# Altium PCB Ruler_PCB.PcbDoc
Units mil, origin at the board's own origin, x right, y up, seen from the top; angles counter-clockwise.
Board outline 1897 x 1407 mil, 2 copper layers (Top Layer, Bottom Layer); 18 components, 24 nets, 71 pads, 0 vias.
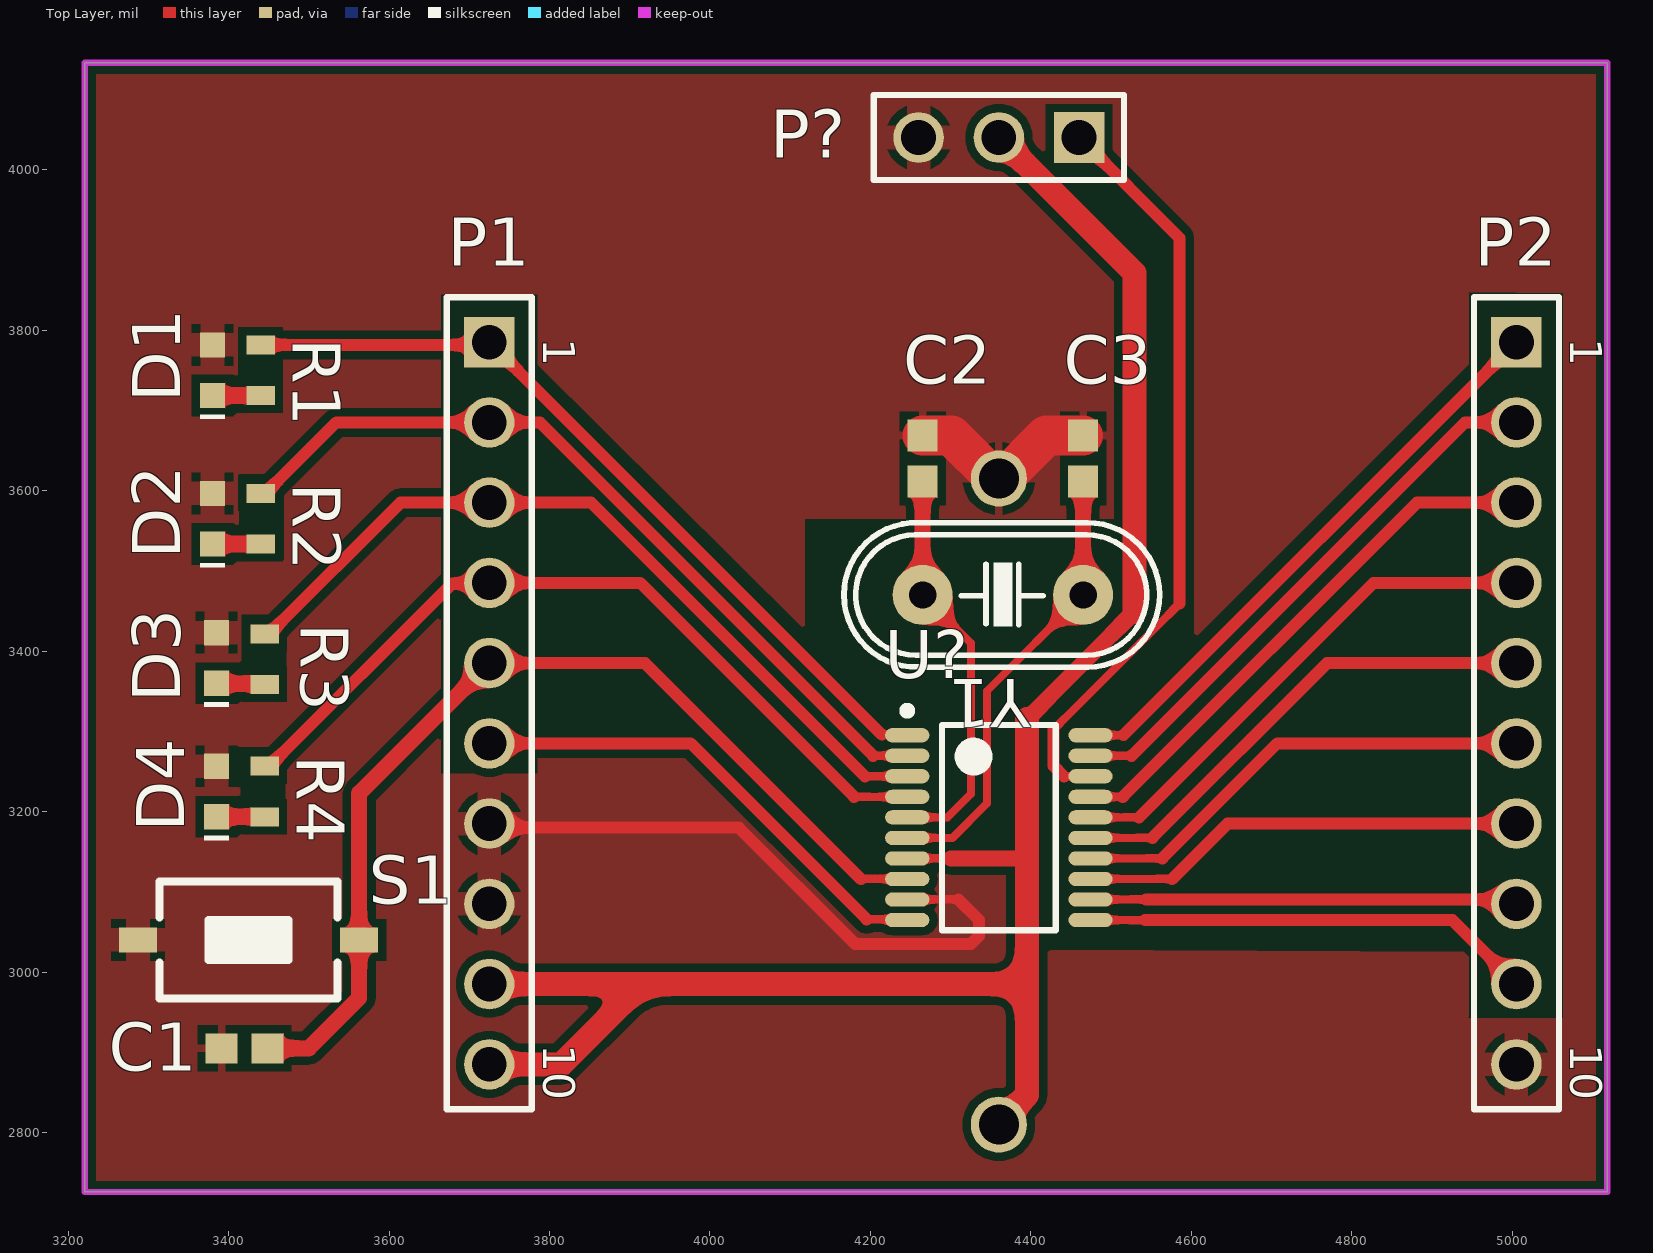
[diagram p0: Top Layer view]
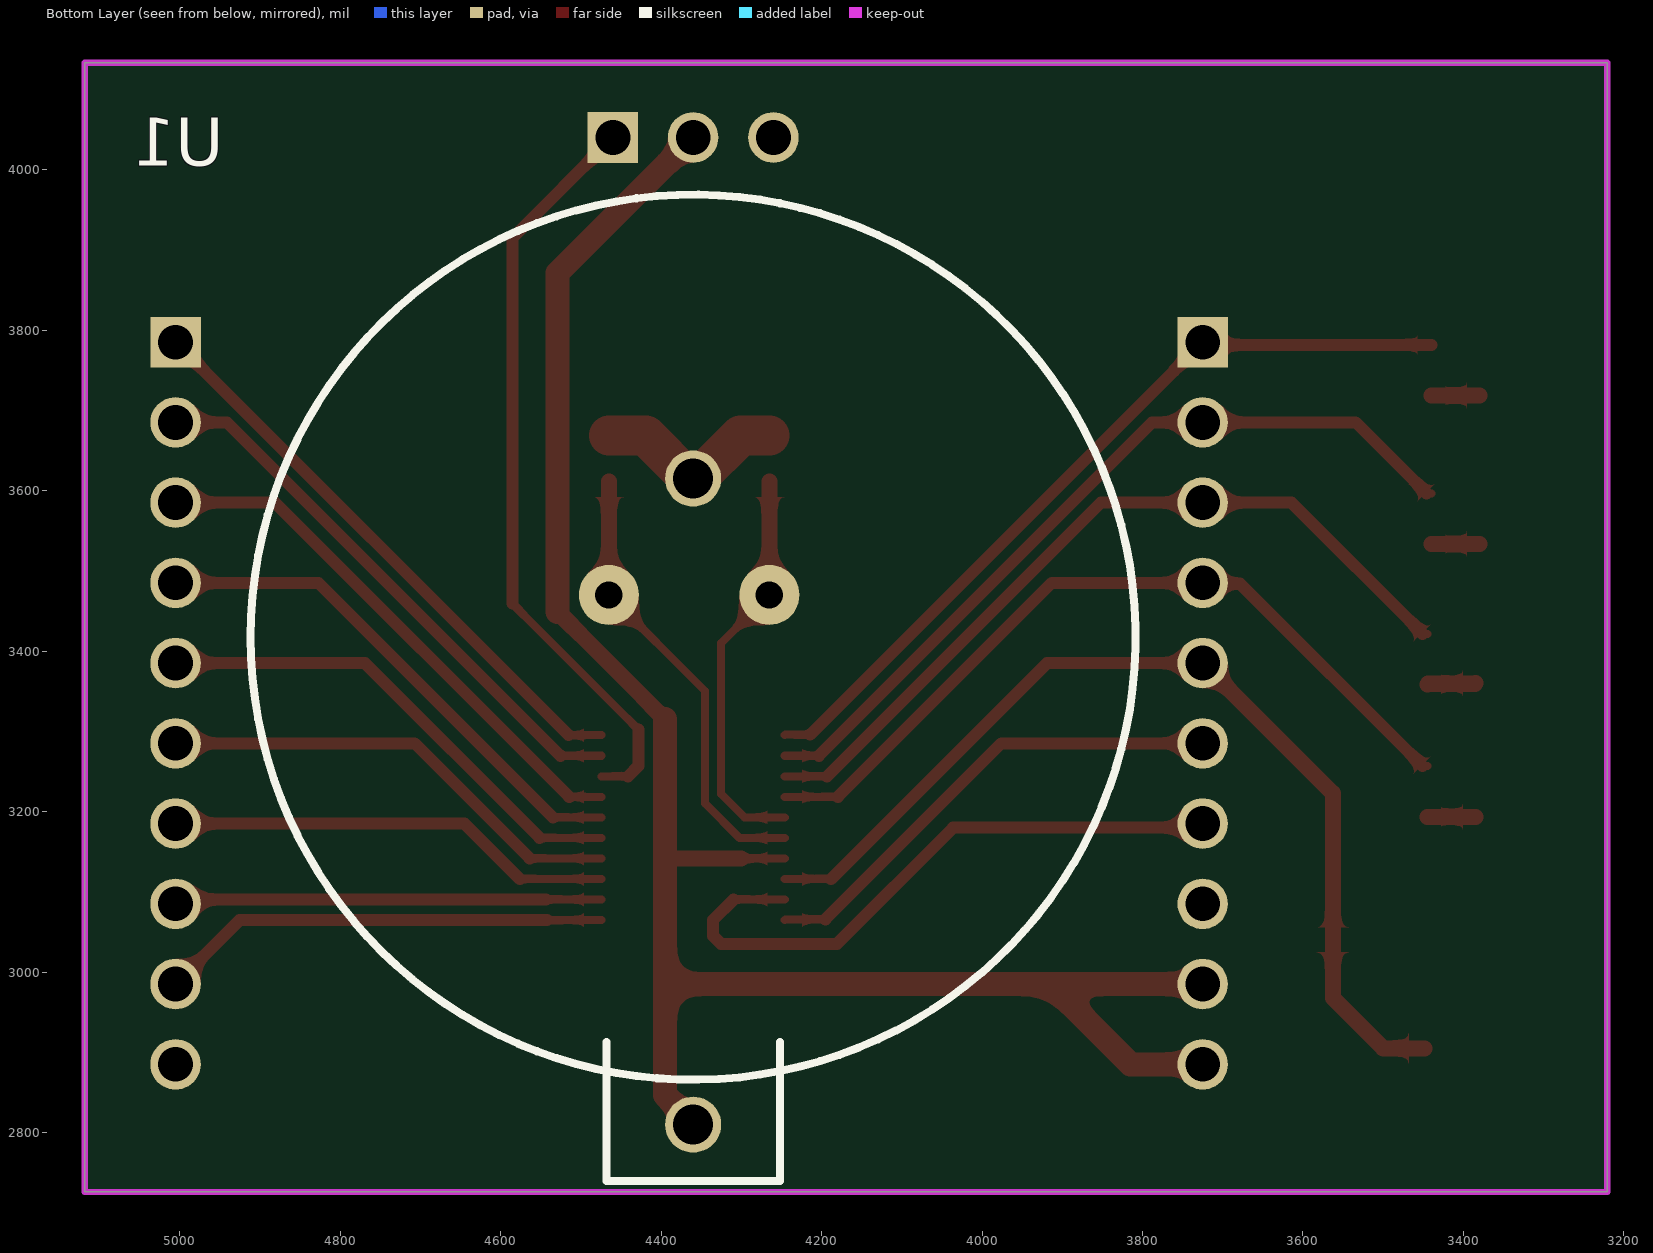
[diagram p1: Bottom Layer view, seen from below]
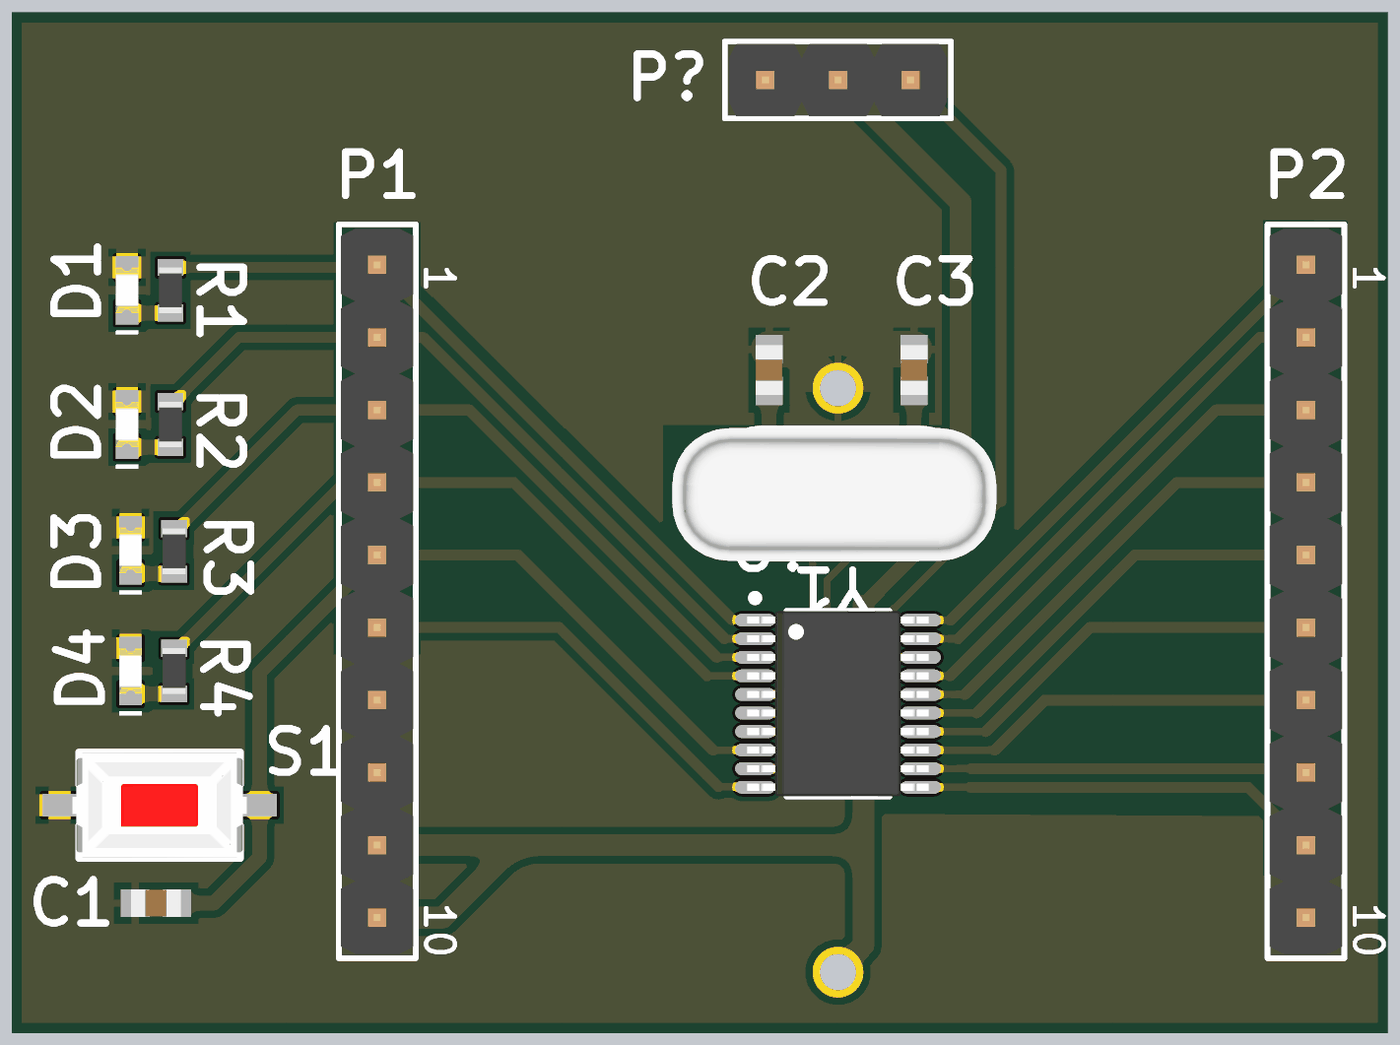
[diagram p2: 3D render of the assembled board from above, using the file's embedded part models]

## Layer stack, top to bottom
Top Solder: solder mask 0.4, Solder Resist, Dk 3.5
Top Layer: signal copper 1.4
Dielectric 1: dielectric 12.6, FR-4, Dk 4.8
Bottom Layer: signal copper 1.4
Bottom Solder: solder mask 0.4, Solder Resist, Dk 3.5

## Board outline
3221,2726 3221,4133 5118,4133 5118,2726

## Design rules (kind name [scope] priority, off if disabled: settings)
Clearance [All] p1: gap=10 ignorepadtopadclearanceinfootprint=TRUE
PolygonConnect PolygonConnect_3 [All vs IsNamedPolygon('NONET_L01_P000')] p1: thpad.connectstyle=Relief thpad.reliefconductorwidth=30 thpad.reliefentries=4 thpad.polygonreliefangle="90 Angle" thpad.airgapwidth=10 smdpad.connectstyle=Relief smdpad.reliefconductorwidth=30 smdpad.reliefentries=4 smdpad.polygonreliefangle="90 Angle" smdpad.airgapwidth=10 via.connectstyle=Relief via.reliefconductorwidth=10 via.reliefentries=4 via.polygonreliefangle="90 Angle" via.airgapwidth=10
PolygonConnect PolygonConnect_2 [All vs IsNamedPolygon('NONET_L01_P000')] p2: thpad.connectstyle=Relief thpad.reliefconductorwidth=30 thpad.reliefentries=4 thpad.polygonreliefangle="90 Angle" thpad.airgapwidth=10 smdpad.connectstyle=Relief smdpad.reliefconductorwidth=30 smdpad.reliefentries=4 smdpad.polygonreliefangle="90 Angle" smdpad.airgapwidth=10 via.connectstyle=Relief via.reliefconductorwidth=10 via.reliefentries=4 via.polygonreliefangle="90 Angle" via.airgapwidth=10
PolygonConnect PolygonConnect_1 [All vs IsNamedPolygon('NONET_L01_P000')] p3: thpad.connectstyle=Relief thpad.reliefconductorwidth=10 thpad.reliefentries=4 thpad.polygonreliefangle="90 Angle" thpad.airgapwidth=30 smdpad.connectstyle=Relief smdpad.reliefconductorwidth=10 smdpad.reliefentries=4 smdpad.polygonreliefangle="90 Angle" smdpad.airgapwidth=10 via.connectstyle=Relief via.reliefconductorwidth=10 via.reliefentries=4 via.polygonreliefangle="90 Angle" via.airgapwidth=10
PolygonConnect [All] p4: connectstyle=Relief reliefconductorwidth=10 reliefentries=4 polygonreliefangle="90 Angle" airgapwidth=10
RoutingVias [All] p1: holewidth=28 width=50 viastyle="Through Hole" minholewidth=28 minwidth=50 maxholewidth=28 maxwidth=50
SolderMaskExpansion [All] p1: expansion=4 istentingtop=FALSE
Width [All] p1: maxlimit=50 minlimit=10 preferedwidth=20 minimp=50.000000 maximp=50.000000 favimp=50.000000
30 further rules are at their usual default settings.

## Classes and differential pairs
component class 01_MCU: C1 C2 C3 D1 D2 D3 D4 P2 R1 R2 R3 R4 S1 U1 U? Y1

## Components (designator, comment, footprint, x,y, rotation, side; value= is the part's Value field where it differs from the comment)
C1 "22pF" CAPC17595_87N_KEM_0603 3420,2905 r180 top
C2 "20pF" CAPC17595_87N_KEM_0603 4265,3640 r270 top
C3 "20pF" CAPC17595_87N_KEM_0603 4465,3640 r270 top
D1 "Color ? , 3.2V, 140°" WL-SMCW_0603_150060xx75003 3380,3750 r90 top
D2 "Color ? , 3.2V, 140°" WL-SMCW_0603_150060xx75003 3380,3565 r90 top
D3 "Color ? , 3.2V, 140°" WL-SMCW_0603_150060xx75003 3385,3391.5 r90 top
D4 "Color ? , 3.2V, 140°" WL-SMCW_0603_150060xx75003 3385,3225 r90 top
P1 "61301011121" 61301011121 3725,3335 r270 top (schematic designator P?)
P2 "61301011121" 61301011121 5005,3335 r270 top (schematic designator P?)
P? "61300311121" 61300311121 4360,4040 r180 top
R1 "100Ω" "WRIS-PSMB_0603_L1.6W0.8H0.3 - duplicate" 3440,3750 r270 top
R2 "100Ω" "WRIS-PSMB_0603_L1.6W0.8H0.3 - duplicate" 3440,3565 r270 top
R3 "100Ω" "WRIS-PSMB_0603_L1.6W0.8H0.3 - duplicate" 3445,3390 r270 top
R4 "100Ω" "WRIS-PSMB_0603_L1.6W0.8H0.3 - duplicate" 3445,3225 r270 top
S1 "Tact SW - 2Pin" SW-SMD 3425,3040 r180 top
U1 "CR2032_Battery Base" TO_106_KEY 4360,3615 r180 bottom
U? "CH32V003F4P6" TSOP20_CH32V003 4360,3180 r0 top
Y1 "24MHz" XT2 4365,3470 r0 top

## Footprints (in the part's own frame and the unit in brackets; to place one, negate y for a bottom-side part, rotate by r counter-clockwise, add the part's x,y. Pads: shape width x height; smd on the part's side, far side on the other; paste and mask are expansions set on the pad)
61300311121 [mm] "Pin Header, pitch 2.54 mm, THT, Vertical, single row, 3p"
  rect 1.6x1.6 hole 1.1: 1(-2.54,0)
  round 1.6 hole 1.1: 2(0,0) 3(2.54,0)
  silkscreen extent -3.96,-1.35 3.96,1.35, body extent -3.81,-1.27 3.81,1.27, height 8.57
61301011121 [mm] "Pin Header, pitch 2.54 mm, THT, Vertical, single row, 10p"
  rect 1.6x1.6 hole 1.1: 1(-11.43,0)
  round 1.6 hole 1.1: 2(-8.89,0) 3(-6.35,0) 4(-3.81,0) 5(-1.27,0) 6(1.27,0) 7(3.81,0) 8(6.35,0) 9(8.89,0) 10(11.43,0)
  silkscreen extent -12.85,-1.35 12.85,1.35, body extent -12.7,-1.27 12.7,1.27, height 8.57
CAPC17595_87N_KEM_0603 [mm]
  rect 1.006x0.95 smd paste+0 mask+0: 1(-0.728,0) 2(0.728,0)
  body extent -0.87,-0.48 0.87,0.48, height 0.87
SW-SMD [mm] "Switch SMD type"
  rect 1.2x0.8 smd: 1(-3.5,0) 2(3.5,0)
  silkscreen extent -2.82,-1.85 2.82,1.85, body extent -3.05,-1.85 3.05,1.85, height 2.5
TO_106_KEY [mil]
  round 70 / inner round 60 / far side round 70 hole 50 paste-35 mask+0: 1(0,0) 2(0,-805.12)
  silkscreen extent -552,-875 551,354
TSOP20_CH32V003 [mm] "TSOP, 20-Leads, Body 6.45x4.35mm, Pitch 0.65mm, IPC Medium Density"
  oval 1.4x0.45 smd: 1(-2.9,2.925) 2(-2.9,2.275) 3(-2.9,1.625) 4(-2.9,0.975) 5(-2.9,0.325) 6(-2.9,-0.325) 7(-2.9,-0.975) 8(-2.9,-1.625) 9(-2.9,-2.275) 10(-2.9,-2.925) 11(2.9,-2.925) 12(2.9,-2.275) 13(2.9,-1.625) 14(2.9,-0.975) 15(2.9,-0.325) 16(2.9,0.325) 17(2.9,0.975) 18(2.9,1.625) 19(2.9,2.275) 20(2.9,2.925)
  silkscreen extent -3.02,-3.25 1.8,3.82, body extent -3.17,-3.25 3.17,3.25, height 1.1
WL-SMCW_0603_150060xx75003 [mm] "SMD Mono-color Chip LED, body 1.6x0.8mm"
  rect 0.8x0.8 smd: 1(-0.8,0) 2(0.8,0)
  silkscreen extent -1.55,-0.4 -1.4,0.4, body extent -0.8,-0.4 0.8,0.4, height 0.7
"WRIS-PSMB_0603_L1.6W0.8H0.3 - duplicate" [mm] "Metal Plate Resistor, SMT, body size 1.6x0.8mm"
  rect 0.6x0.9 smd: 1(-0.8,0) 2(0.8,0)
  body extent -0.8,-0.4 0.8,0.4, height 0.3
XT2 [mil] "Footpin for Crystal 2 pin"
  round 75 hole 34: 1(-100,0) 2(100,0)
  silkscreen extent -198,-90 195,90, body extent -233,-93 213,90, height 138

## Part data
C1 C2 C3: library part Capacitor_SMD, "No Description Available", Manufacturer_Part_Number=C1206C104K5RACTU, Mfr_Name=Kemet, Copyright="Copyright (C) 2023 Ultra Librarian. All rights reserved.", RefDes=RefDes, Type=DEV
D1 D2 D3 D4: library part LED_smd, "WL-SMCW Mono-color Chip LED Waterclear, size ?, color ?, 3.2V, 140°", Case/Size Code=0603, Emitting Color=Blue, Forward Voltage=3.2V, Manufacturer="Wurth Elektronik", Manufacturer Part Number=150060BS75003, Operating Temperature Max=100°C, Operating Temperature Min=-40°C, Category="Signal LEDs", Chip Technology=InGaN, ComponentLink1Description="Website Link", ComponentLink1URL=https://www.we-online.com/redexpert/article/150060BS75003?ad, ComponentLink2Description="Datasheet Link", ComponentLink2URL=https://www.we-online.com/redexpert/spec/150060BS75003?ad, Dominant Wavelength=470nm, Height=0.7mm, Length=1.6mm, Luminous Intensity=350mcd, Match Code=WL-SMCW, Mount="Surface Mount", Packaging="Tape and Reel", Peak Wavelength=465nm, Viewing Angle=140°, Width=0.8mm
P1 P2: "WR-PHD Pin Header, THT, pitch 2.54mm, Single Row, Vertical, 10p", Contact Resistance=20mOhm, Manufacturer="Wurth Elektronik", Operating Temperature="-40 to +105degC", Rated Current=3A, Withstanding Voltage=500VAC, Working Voltage=250VAC, ComponentLink1Description=Manufacturer, ComponentLink1URL=http://www.we-online.de, ComponentLink2Description=Datasheet, ComponentLink2URL=https://www.we-online.com/catalog/datasheet/61301011121.pdf, Gender="Pin Header", Manufacturer Part Number=61301011121, Mounting Technology=THT, Orientation=Vertical, Packaging=Bag, Pin Number=10, Pitch=2.54mm, Published Date="May 2020", Row Number=Single
P?: "WR-PHD Pin Header, THT, pitch 2.54mm, Single Row, Vertical, 3p", Contact Resistance=20mOhm, Manufacturer="Wurth Elektronik", Operating Temperature="-40 to +105degC", Rated Current=3A, Withstanding Voltage=500VAC, Working Voltage=250VAC, ComponentLink1Description=Manufacturer, ComponentLink1URL=http://www.we-online.de, ComponentLink2Description=Datasheet, ComponentLink2URL=https://www.we-online.com/catalog/datasheet/61300311121.pdf, Gender="Pin Header", Manufacturer Part Number=61300311121, Mounting Technology=THT, Orientation=Vertical, Packaging=Bag, Pin Number=3, Pitch=2.54mm, Published Date="May 2020", Row Number=Single
R1 R2 R3 R4: library part Resistor_SMD, "WRIS-PSMC Metal Plate Resistor, SMT, size 2512, 2W, 5mΩ, +/-1%", Case/Size Code=2512, Manufacturer="Wurth Elektronik", Manufacturer Part Number=580070763005, Operating Temperature Max=155°C, Operating Temperature Min=-55°C, Rated Current=20A, Rated Power=2W, Resistance=5mΩ, Resistance Tolerance=+/-1%, Temperature Coefficient of Resistance=+/-100ppm/°C, Category="Metal Plate Resistors", ComponentLink1Description="Website Link", ComponentLink1URL=https://www.we-online.com/redexpert/article/580070763005?ad, ComponentLink2Description="Datasheet Link", ComponentLink2URL=https://www.we-online.com/redexpert/spec/580070763005?ad, Height=0.51mm, Length=6.3mm, Match Code=WRIS-PSMC, Mount="Surface Mount", Packaging="Tape and Reel", Technical Reference=MC2512R005F201KAATE0000, Width=3.1mm
S1: "Switch button 2 pin"
U1: "No Description Available", Mfr_Name="Keystone Electronics", RefDes=RefDes, Type=Type
U?: "CH32V003 series is based on QingKe RISC-V2A core design of industrial-grade general-purpose microcontroller, support 48MHz system main frequency, with wide voltage, 1-wire serial debug interface, low-power consumption, ultra-small package, etc. CH32V003 series built-in a group of DMA controller, a group of 10-bit ADC, a group of op-amp comparators, multiple timers and standard communication interfaces USART, I2C, SPI, etc.", Built-in voltage regulator="1.5V power supply required by the core", Manufaccture=WCH, Operating voltage="2.7V to 5.5V", ComponentLink1Description=Datasheet, ComponentLink1URL=http://www.wch-ic.com/downloads/CH32V003DS0_PDF.html, ComponentLink2Description="Reference Manual", ComponentLink2URL=http://www.wch-ic.com/downloads/CH32V003RM_PDF.html, ComponentLink3Description="Evaluation board manual and reference routines", ComponentLink3URL=http://www.wch.cn/downloads/CH32V003EVT_ZIP.html, ComponentLink4Description=IDE, ComponentLink4URL=http://www.wch-ic.com/products/www.mounriver.com/, FLASH="16KB program Flash memory (CodeFlash) for storing user applications", HSE=4~25MHz, HSI="8MHz, 16MHz, 24MHz, 48MHz", LSI=128kHz, SRAM="2KB, starting address 0x20000000, supports byte, half-word,(2 bytes), and full-word (4bytes) access", System memory="1920B (bootloader) for storing the system bootloader (factory-cured bootloader)", User-selected word storage=64B, Vendor configuration word storage, factory-cured and unmodifiable by users=64B
Y1: library part XTAL, "Crystal Oscillator", LatestRevisionDate=17-Jul-2002, LatestRevisionNote="Re-released for DXP Platform.", PackageDescription="Crystal, Thru-Hole; 2 Leads; Body 3.1 x 8.2 mm (Dia.xH)", PackageReference=R38, Published=8-Jun-2000, Publisher="Altium Limited"

## Nets (pads, with @x,y where several pads share a name; then routed paths per layer and width w, separated by ;. In a path a pad name is that pad's centre, name@x,y a point inside that pad or via, vN(x,y) a via of type N, cw(c..) or ccw(c..) an arc to the next point about the centre after c; other vN are vias at no path point)
3V_MCU: P1.9 P1.10 P?.2 U1.2 U?.7 | length 2422.1
  Top Layer w10: U?.7 4300.39,3141.61 ; 4391.61,3141.61 4395,3145
  Top Layer w20: 4300.39,3141.61 4391.61,3141.61 ; U1.2 U1.2@4360,2811.6 ; 4395,3315 4529,3449
  Top Layer w30: P1.10 3815,2885 3915,2985 ; P1.9 3915,2985 ; U1.2@4360,2811.6 4395,2846.6 4395,2985 ; P?.2 4529,3871 4529,3449 ; 4395,3315 4395,3145 4395,2985 ; 3915,2985 4395,2985
GND: C1.2 C2.1 C3.1 D1.2 D2.2 D3.2 D4.2 P1.7 P1.8 P2.10 P?.3 S1.2 U1.1 U?.9 | length 1040.4
  Top Layer w10: P1.7 P1.7@3730,3180 ; U?.9 4309.57,3090.43
  Top Layer w15: P1.7@3730,3180 4036,3180 4181,3035 4325,3035 4335,3045 4335,3065 4309.57,3090.43
  Top Layer w50: C2.1 4300.93,3668.65 4354.59,3615 U1.1 4365.41,3615 4419.07,3668.65 C3.1
NetD1_1: D1.1 R1.2 | length 60
  Top Layer w20: D1.1 R1.2
NetD2_1: D2.1 R2.2 | length 60
  Top Layer w20: D2.1 R2.2
NetD3_1: D3.1 R3.2 | length 60.6
  Top Layer w20: D3.1 3385.75,3359.25 3444.25,3359.25 R3.2
NetD4_1: D4.1 R4.2 | length 60
  Top Layer w20: D4.1 R4.2
OSC_IN: C2.2 U?.5 Y1.1 | length 505.4
  Top Layer w10: U?.5 4295.76,3192.8 4325,3222.04 4325,3410 Y1.1
  Top Layer w20: Y1.1 C2.2
OSC_OUT: C3.2 U?.6 Y1.2 | length 568
  Top Layer w10: U?.6 4302.2,3167.2 4345,3210 4345,3350 Y1.2
  Top Layer w20: Y1.2 C3.2
PC0: P1.6 U?.10 | length 612
  Top Layer w10: 4195.27,3065.73 4244.94,3065.73 U?.10
  Top Layer w15: P1.6 3976,3285 4195.27,3065.73
PC1: P2.9 U?.11 | length 563.9
  Top Layer w10: U?.11 4542.16,3064.84
  Top Layer w15: 4542.16,3064.84 4925.16,3064.84 P2.9
PC2: P2.8 U?.12 | length 533.1
  Top Layer w10: U?.12 4543.57,3090.43
  Top Layer w15: 4543.57,3090.43 4999.57,3090.43 P2.8
PC3: P2.7 U?.13 | length 559.4
  Top Layer w10: U?.13 4576.02,3116.02
  Top Layer w15: 4576.02,3116.02 4645,3185 P2.7
PC4: P2.6 U?.14 | length 590.2
  Top Layer w10: U?.14 4563.61,3141.61
  Top Layer w15: 4563.61,3141.61 4707,3285 P2.6
PC5: P2.5 U?.15 | length 621
  Top Layer w10: U?.15 4551.2,3167.2
  Top Layer w15: 4551.2,3167.2 4769,3385 P2.5
PC6: P2.4 U?.16 | length 651.9
  Top Layer w10: U?.16 4534.8,3192.8
  Top Layer w15: 4534.8,3192.8 4827,3485 P2.4
PC7: P2.3 U?.17 | length 682.7
  Top Layer w10: U?.17 4514.39,3218.39
  Top Layer w15: 4514.39,3218.39 4881,3585 P2.3
PD0: C1.1 P1.5 S1.1 U?.8 | length 1256.8
  Top Layer w10: 4187.98,3116.02 U?.8
  Top Layer w15: P1.5 3919,3385 4187.98,3116.02
  Top Layer w20: C1.1 3500,2905 3562.8,2967.8 S1.1 3562.8,3222.8 P1.5
PD2: P2.2 U?.19 | length 702.9
  Top Layer w10: U?.19 4525.57,3269.57
  Top Layer w15: 4525.57,3269.57 4941,3685 P2.2
PD3: P2.1 U?.20 | length 733.7
  Top Layer w10: U?.20 4515.16,3295.16
  Top Layer w15: 4515.16,3295.16 P2.1
PD4: P1.1 R1.1 U?.1 | length 1010.2
  Top Layer w10: P1.1@3721.5,3781.5 P1.1 ; 4214.11,3295.89 4245.1,3295.89 U?.1
  Top Layer w15: R1.1 P1.1@3721.5,3781.5 ; P1.1 4214.11,3295.89
PD5: P1.2 R2.1 U?.2 | length 1014.6
  Top Layer w10: R2.1 R2.1@3445.91,3596.5 ; 4203.43,3269.57 U?.2
  Top Layer w15: R2.1@3445.91,3596.5 3534.41,3685 P1.2 3788,3685 4203.43,3269.57
PD6: P1.3 R3.1 U?.3 | length 1009.8
  Top Layer w10: R3.1 R3.1@3450.91,3421.5 ; 4193.02,3243.98 U?.3
  Top Layer w15: R3.1@3450.91,3421.5 3614.41,3585 P1.3 3852,3585 4193.02,3243.98
PD7: P1.4 R4.1 U?.4 | length 1005.9
  Top Layer w10: R4.1 R4.1@3450.91,3256.5 ; P1.4@3724.09,3484.09 P1.4 ; 4179.61,3218.39 U?.4
  Top Layer w15: R4.1@3450.91,3256.5 3678.5,3484.09 P1.4@3724.09,3484.09 ; P1.4 3913,3485 4179.61,3218.39
SWIO: P?.1 U?.18 | length 951.4
  Top Layer w10: 4428,3302 4585,3459 ; 4441.02,3243.98 U?.18
  Top Layer w15: 4428,3302 4428,3257 4441.02,3243.98 ; P?.1 4585,3915 4585,3459

## Polygon pours and split planes (outlines as drawn)
GND on Top Layer "GND_L01_P000" (solid, remove dead copper, pour order 0): 3221,2726 3221,4133 5118,4133 5118,2726

## Keep-outs
Keep-Out Layer:
  the board outline again, w7.87

## Other copper
Top Layer:
  pour cut-out: 3415.28,3280.31 3415.28,3173.69 3470.72,3173.69 3470.72,3280.31
  pour cut-out: 3416.28,3445.31 3416.28,3338.69 3471.72,3338.69 3471.72,3445.31
  pour cut-out: 3413.28,3620.31 3413.28,3513.69 3468.72,3513.69 3468.72,3620.31
  pour cut-out: 3412.28,3803.31 3412.28,3696.69 3467.72,3696.69 3467.72,3803.31
  pour cut-out: 4119,3564 4119,3376 4603,3376 4603,3564
  pour cut-out: 4946,3847 4946,2944 4945,2943 5063,2943 5063,3845 5062,3846
  pour cut-out: 3665,3844 3665,3248 3785,3248 3785,3844
  pour cut-out: 4963.5,3775.22 4415,3226.79 4415,3028.08 4965.08,3024.92
  pour cut-out: 3766.5,3775.22 4209,3336 4211,3068 3981,3295 3766,3295

## Text inside footprints (layer, text, board x,y; h text height)
P1: Top Overlay "10" at 3791.93,2909.8 h40 r270; Top Overlay "1" at 3791.93,3789.72 h40 r270
P2: Top Overlay "10" at 5071.93,2909.8 h40 r270; Top Overlay "1" at 5071.93,3789.72 h40 r270